# EAGLE board development (EAGLE 6.3)
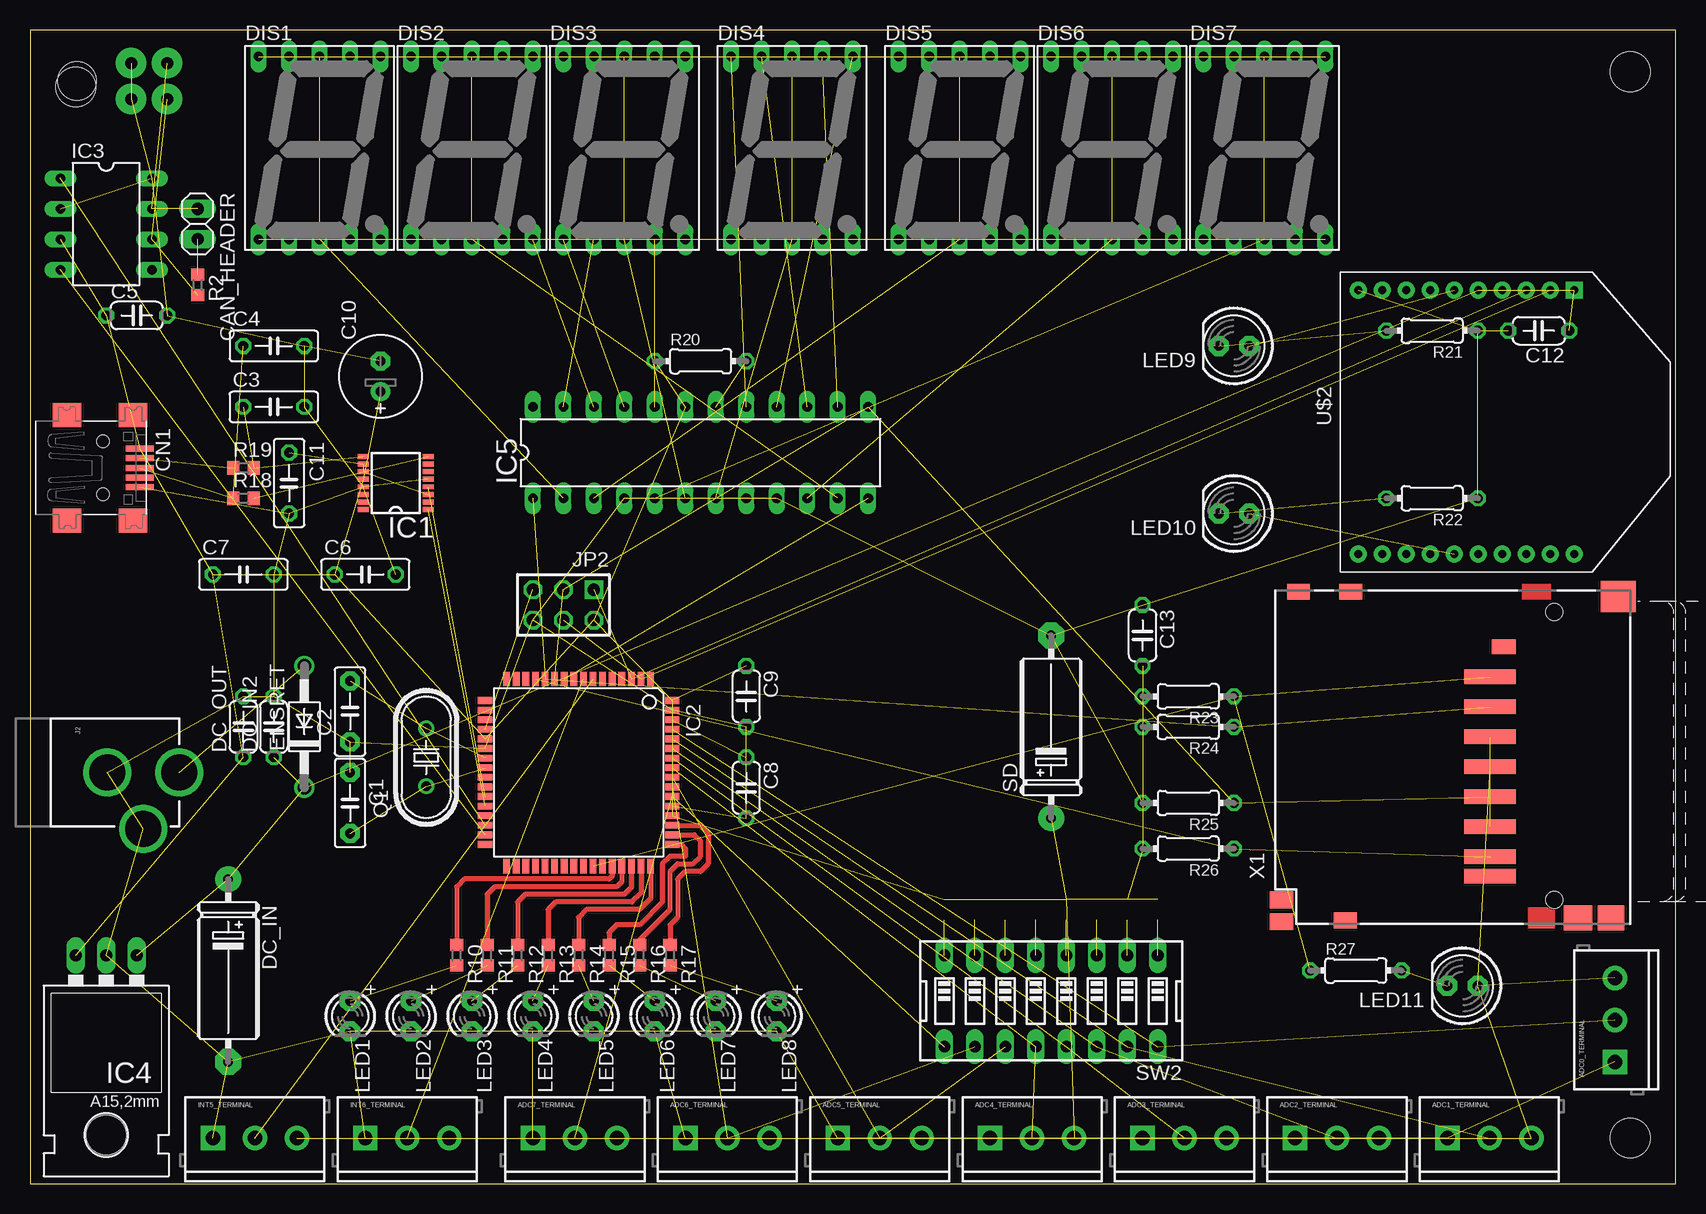
[diagram p0: board, top side]
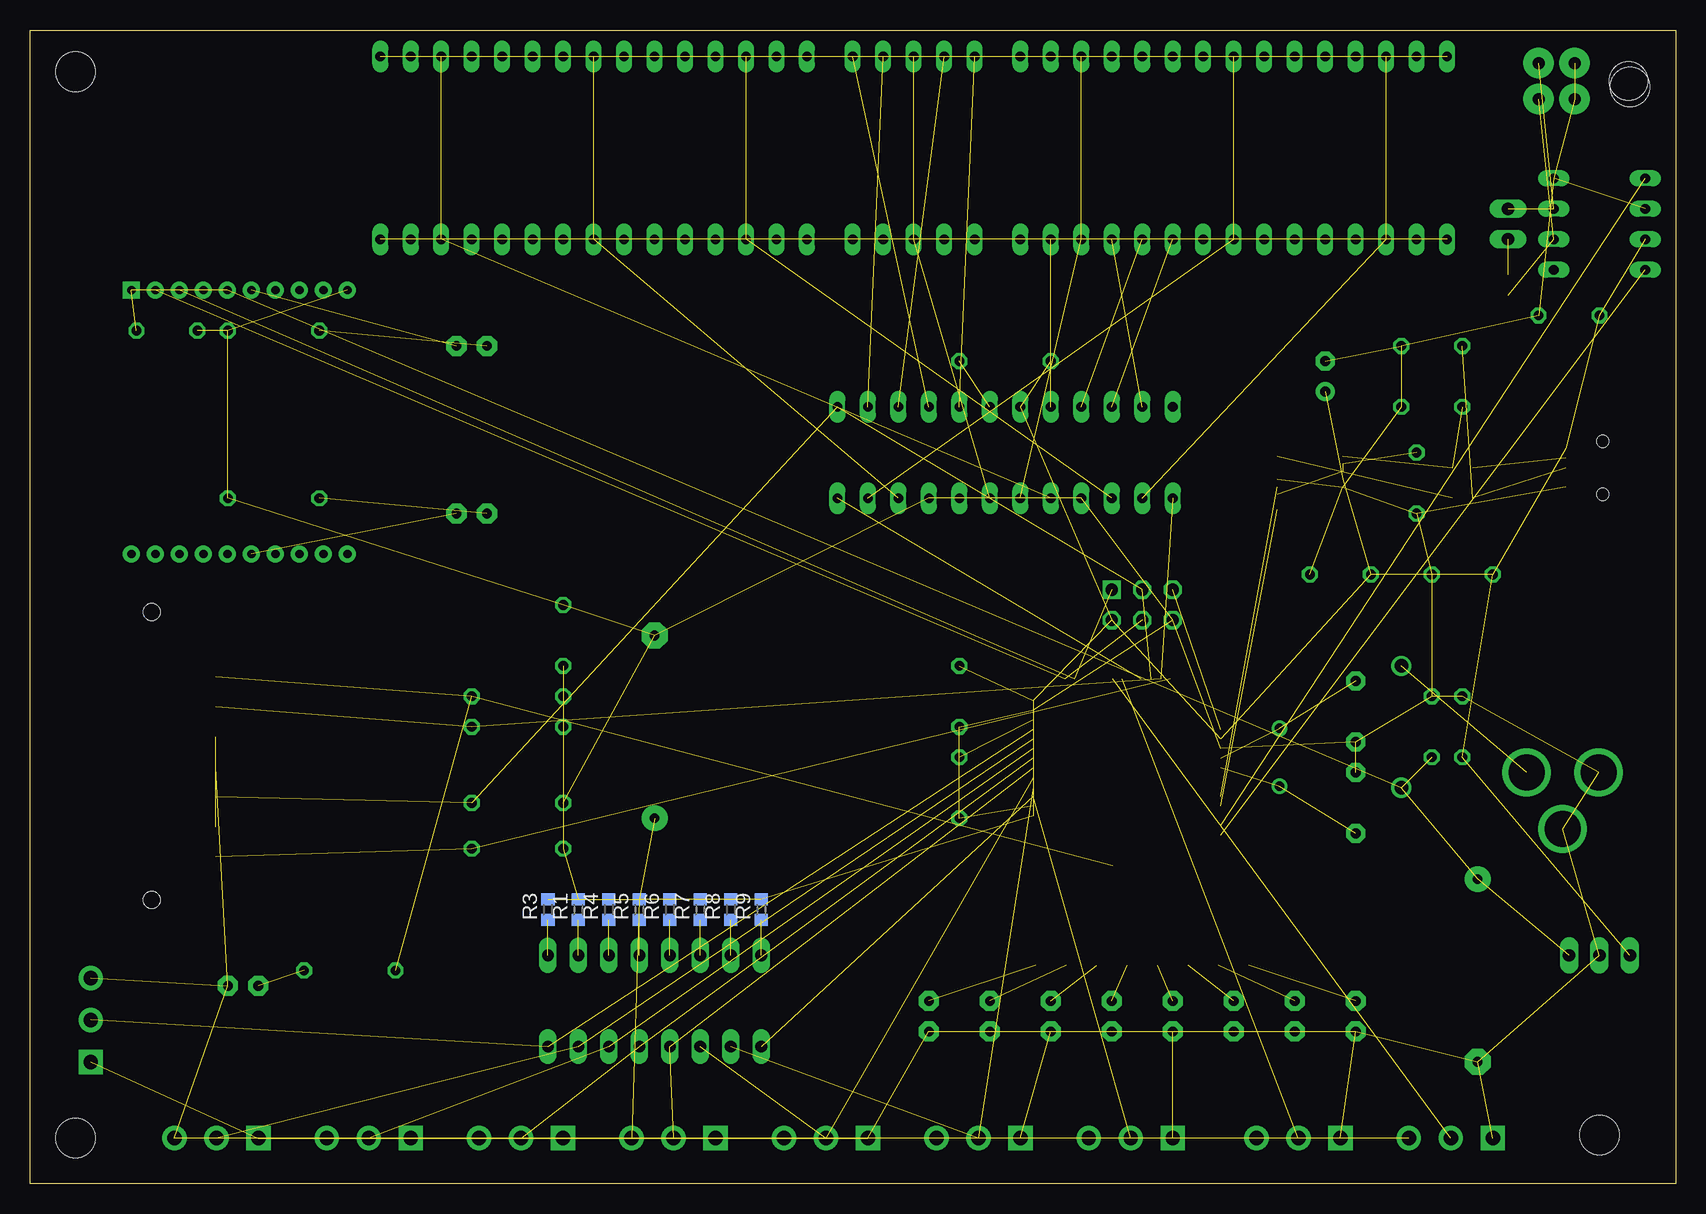
[diagram p1: board, bottom side, seen from below]

Size 137.14 x 96.19 mm. Coordinates in mm from the lower left corner, seen from the top.
Outline: 0,0 137.14,0 137.14,96.19 0,96.19 0,0
Copper layers (1*16): Top 0.035mm / dielectric 1.5mm / Bottom 0.035mm
Design rules "default *": minimum track width 16mil, minimum drill 24mil, track to track 8mil, track to pad 8mil, pad to pad 8mil, via to via 8mil, smd to smd 8mil, copper to edge 40mil, drill to drill 8mil, minimum pad ring 10mil, minimum via ring 8mil, stop-mask expansion 4mil, vias tented up to drill 0mil, thermal gap 10mil

## Footprints (pad centres in the part's own frame; a part is rotated, then mirrored left to right if it is on the bottom)
SCREWTERMINAL-3.5MM-3 = drill 1.2 pad 2.032 square: 1 0,0 | drill 1.2 pad 2.032: 2 3.5,0; 3 7,0
C5B2.5 = drill 0.813 pad 1.6 octagon: 1 -2.54,0; 2 2.54,0
C050-025X075 = drill 0.813 octagon: 1 -2.54,0; 2 2.54,0
C050-024X044 = drill 0.813 octagon: 1 -2.54,0; 2 2.54,0
E2,5-7 = drill 0.813 pad 1.6: + -1.27,0 | drill 0.813 pad 1.6 octagon: - 1.27,0
1X02 = drill 1.016 long: 1 -1.27,0; 2 1.27,0
USB-MINIB = smd 0.5 x 2.308: D+ 0,4.064; D- -0.8,4.064; GND 1.6,4.064; ID 0.8,4.064; VBUS -1.6,4.064 | smd 2 x 2.4: GND1 -4.4,-2; GND2 -4.4,3.5; GND3 4.4,3.5; GND4 4.4,-2 | hole 1: -2.2,1; 2.2,1
E15-5 = drill 0.813 pad 2.159: + -7.62,0 | drill 0.813 pad 2.159 octagon: - 7.62,0
HDSP-M = drill 0.813 long: 1 -5.08,-7.62; 2 -2.54,-7.62; 3 0,-7.62; 4 2.54,-7.62; 5 5.08,-7.62; 6 5.08,7.62; 7 2.54,7.62; 8 0,7.62; 9 -2.54,7.62; 10 -5.08,7.62
DO41-10 = drill 1.118: A 5.08,0; C -5.08,0
SSOP16 = smd 0.914 x 0.406: 1 -2.718,2.223; 2 -2.718,1.587; 3 -2.718,0.953; 4 -2.718,0.318; 5 -2.718,-0.318; 6 -2.718,-0.953; 7 -2.718,-1.587; 8 -2.718,-2.223; 9 2.718,-2.223; 10 2.718,-1.587; 11 2.718,-0.953; 12 2.718,-0.318; 13 2.718,0.318; 14 2.718,0.953; 15 2.718,1.587; 16 2.718,2.223
TQFP64 = smd 1.194 x 0.559: 1 -7.8,6; 2 -7.8,5.2; 3 -7.8,4.4; 4 -7.8,3.6; 5 -7.8,2.8; 6 -7.8,2; 7 -7.8,1.2; 8 -7.8,0.4; 9 -7.8,-0.4; 10 -7.8,-1.2; 11 -7.8,-2; 12 -7.8,-2.8; 13 -7.8,-3.6; 14 -7.8,-4.4; 15 -7.8,-5.2; 16 -7.8,-6; 33 7.8,-6; 34 7.8,-5.2; 35 7.8,-4.4; 36 7.8,-3.6; 37 7.8,-2.8; 38 7.8,-2; 39 7.8,-1.2; 40 7.8,-0.4; 41 7.8,0.4; 42 7.8,1.2; 43 7.8,2; 44 7.8,2.8; 45 7.8,3.6; 46 7.8,4.4; 47 7.8,5.2; 48 7.8,6 | smd 0.559 x 1.194: 17 -6,-7.8; 18 -5.2,-7.8; 19 -4.4,-7.8; 20 -3.6,-7.8; 21 -2.8,-7.8; 22 -2,-7.8; 23 -1.2,-7.8; 24 -0.4,-7.8; 25 0.4,-7.8; 26 1.2,-7.8; 27 2,-7.8; 28 2.8,-7.8; 29 3.6,-7.8; 30 4.4,-7.8; 31 5.2,-7.8; 32 6,-7.8; 49 6,7.8; 50 5.2,7.8; 51 4.4,7.8; 52 3.6,7.8; 53 2.8,7.8; 54 2,7.8; 55 1.2,7.8; 56 0.4,7.8; 57 -0.4,7.8; 58 -1.2,7.8; 59 -2,7.8; 60 -2.8,7.8; 61 -3.6,7.8; 62 -4.4,7.8; 63 -5.2,7.8; 64 -6,7.8
DIL08 = drill 0.813 long: 1 -3.81,-3.81; 2 -1.27,-3.81; 3 1.27,-3.81; 4 3.81,-3.81; 5 3.81,3.81; 6 1.27,3.81; 7 -1.27,3.81; 8 -3.81,3.81
78XXL = drill 1.016 long: GND 0,-3.81; IN -2.54,-3.81; OUT 2.54,-3.81 | hole 3.302: 0,11.176
DIL24-3 = drill 0.813 long: 1 -13.97,-3.81; 2 -11.43,-3.81; 3 -8.89,-3.81; 4 -6.35,-3.81; 5 -3.81,-3.81; 6 -1.27,-3.81; 7 1.27,-3.81; 8 3.81,-3.81; 9 6.35,-3.81; 10 8.89,-3.81; 11 11.43,-3.81; 12 13.97,-3.81; 13 13.97,3.81; 14 11.43,3.81; 15 8.89,3.81; 16 6.35,3.81; 17 3.81,3.81; 18 1.27,3.81; 19 -1.27,3.81; 20 -3.81,3.81; 21 -6.35,3.81; 22 -8.89,3.81; 23 -11.43,3.81; 24 -13.97,3.81
POWER_JACK_PTH = drill 2.997: GND 0,7.7; GNDBREAK 4.7,10.7; PWR 0,13.7
AVR-ISP-6 = drill 1.016 square: 1 -2.54,-1.27 | drill 1.016 octagon: 2 -2.54,1.27; 3 0,-1.27; 4 0,1.27; 5 2.54,-1.27; 6 2.54,1.27
STAND-OFF = hole 3.302: 0,0
LED3MM = drill 0.813 pad 1.676 octagon: A -1.27,0; K 1.27,0
LED5MM = drill 0.813 pad 1.676 octagon: A -1.27,0; K 1.27,0
HC49U70 = drill 0.813: 1 -2.413,0; 2 2.413,0
R0603 = smd 1 x 1.1: 1 -0.85,0; 2 0.85,0
0204/7 = drill 0.813 octagon: 1 -3.81,0; 2 3.81,0
DIPSWITCH-08 = drill 0.97 long: 1 -8.89,-3.81; 2 -6.35,-3.81; 3 -3.81,-3.81; 4 -1.27,-3.81; 5 1.27,-3.81; 6 3.81,-3.81; 7 6.35,-3.81; 8 8.89,-3.81; 9 8.89,3.81; 10 6.35,3.81; 11 3.81,3.81; 12 1.27,3.81; 13 -1.27,3.81; 14 -3.81,3.81; 15 -6.35,3.81; 16 -8.89,3.81
MICROFIT4SOCK = drill 1 pad 2.54: PIN1 -2,0; PIN2 1,0; PIN3 -2,-3; PIN4 1,-3 | hole 3.2: -0.5,-7.5
XBEE = drill 0.7 pad 1.422 square: 1 -11,5.5 | drill 0.7 pad 1.422: 2 -11,3.5; 3 -11,1.5; 4 -11,-0.5; 5 -11,-2.5; 6 -11,-4.5; 7 -11,-6.5; 8 -11,-8.5; 9 -11,-10.5; 10 -11,-12.5; 11 11,-12.5; 12 11,-10.5; 13 11,-8.5; 14 11,-6.5; 15 11,-4.5; 16 11,-2.5; 17 11,-0.5; 18 11,1.5; 19 11,3.5; 20 11,5.5
SDBMF-009XXBXX2 = smd 1.2 x 4.3: 1 6.7,5.325; 2 4.2,5.325; 3 1.7,5.325; 4 -0.8,5.325; 5 -3.3,5.325; 6 -5.8,5.325; 7 -8.3,5.325; 8 -9.925,5.325 | smd 1.2 x 2: 9 9.2,4.175 | smd 2.1 x 2.4: M1 -13.4,-2 | smd 2.6 x 2.9: M2 13.4,-5.35 | smd 1.3 x 1.9: M3 -13.6,17.4; M4 13.8,16.95; M5 13.8,21.3 | smd 1.4 x 1.95: SW1 -11.9,22.7; SW3 -13.7,22.7 | smd 2.1 x 2.2: SW2 -13.4,-4.75 | hole 1.4: -11.9,0; 12.1,0

## Placement (x,y rotation side)
ADC0_TERMINAL  [SCREWTERMINAL-3.5MM-3]  132.08,10.16 90 top
ADC1_TERMINAL  [SCREWTERMINAL-3.5MM-3]  118.11,3.81 0 top
ADC2_TERMINAL  [SCREWTERMINAL-3.5MM-3]  105.41,3.81 0 top
ADC3_TERMINAL  [SCREWTERMINAL-3.5MM-3]  92.71,3.81 0 top
ADC4_TERMINAL  [SCREWTERMINAL-3.5MM-3]  80.01,3.81 0 top
ADC5_TERMINAL  [SCREWTERMINAL-3.5MM-3]  67.31,3.81 0 top
ADC6_TERMINAL  [SCREWTERMINAL-3.5MM-3]  54.61,3.81 0 top
ADC7_TERMINAL  [SCREWTERMINAL-3.5MM-3]  41.91,3.81 0 top
C1  22pF  [C5B2.5]  26.67,31.75 270 top
C2  22pF  [C5B2.5]  26.67,39.37 90 top
C3  47pf  [C050-025X075]  20.32,64.77 0 top
C4  47pf  [C050-025X075]  20.32,69.85 0 top
C5  100nF  [C050-024X044]  8.89,72.39 0 top
C6  10nf  [C050-025X075]  27.94,50.8 0 top
C7  100nf  [C050-025X075]  17.78,50.8 0 top
C8  100nF  [C050-024X044]  59.69,33.02 270 top
C9  100nF  [C050-024X044]  59.69,40.64 270 top
C10  4.7uf  [E2,5-7]  29.21,67.31 90 top
C11  100nf  [C050-025X075]  21.59,58.42 270 top
C12  100nF  [C050-024X044]  125.73,71.12 180 top
C13  100nF  [C050-024X044]  92.71,45.72 270 top
CAN_HEADER  [1X02]  13.97,80.01 270 top
CN1  [USB-MINIB]  5.08,59.69 270 top
DC_IN  330uF  [E15-5]  16.51,17.78 270 top
DC_IN2  100nF  [C050-024X044]  20.32,38.1 90 top
DC_OUT  100nF  [C050-024X044]  17.78,38.1 90 top
DIS1  HD-H101  [HDSP-M]  24.13,86.36 0 top
DIS2  HD-H101  [HDSP-M]  36.83,86.36 0 top
DIS3  HD-H101  [HDSP-M]  49.53,86.36 0 top
DIS4  HD-H101  [HDSP-M]  63.5,86.36 0 top
DIS5  HD-H101  [HDSP-M]  77.47,86.36 0 top
DIS6  HD-H101  [HDSP-M]  90.17,86.36 0 top
DIS7  HD-H101  [HDSP-M]  102.87,86.36 0 top
ENSRET  1N4004  [DO41-10]  22.86,38.1 90 top
IC1  FT230XS  [SSOP16]  30.48,58.42 180 top
IC2  MEGA128-A  [TQFP64]  45.72,34.29 270 top
IC3  PCA82C250  [DIL08]  6.35,80.01 270 top
IC4  [78XXL]  6.35,15.24 180 top
IC5  MAX7219CNG  [DIL24-3]  55.88,60.96 0 top
INT5_TERMINAL  [SCREWTERMINAL-3.5MM-3]  15.24,3.81 0 top
INT6_TERMINAL  [SCREWTERMINAL-3.5MM-3]  27.94,3.81 0 top
J2  POWER_JACKPTH  [POWER_JACK_PTH]  -1.27,34.29 270 top
JP2  AVR-ISP-6  [AVR-ISP-6]  44.45,48.26 180 top
JP3  STAND-OFF  [STAND-OFF]  133.35,3.81 0 top
JP4  STAND-OFF  [STAND-OFF]  133.35,92.71 0 top
JP6  STAND-OFF  [STAND-OFF]  3.81,91.44 0 top
LED1  [LED3MM]  26.67,13.97 270 top
LED2  [LED3MM]  31.75,13.97 270 top
LED3  [LED3MM]  36.83,13.97 270 top
LED4  [LED3MM]  41.91,13.97 270 top
LED5  [LED3MM]  46.99,13.97 270 top
LED6  [LED3MM]  52.07,13.97 270 top
LED7  [LED3MM]  57.15,13.97 270 top
LED8  [LED3MM]  62.23,13.97 270 top
LED9  [LED5MM]  100.33,69.85 180 top
LED10  [LED5MM]  100.33,55.88 180 top
LED11  [LED5MM]  119.38,16.51 180 top
Q1  12 MHz  [HC49U70]  33.02,35.56 90 top
R1  [R0603]  91.44,22.86 90 bottom
R2  120  [R0603]  13.97,74.93 270 top
R3  [R0603]  93.98,22.86 90 bottom
R4  [R0603]  88.9,22.86 90 bottom
R5  [R0603]  86.36,22.86 90 bottom
R6  [R0603]  83.82,22.86 90 bottom
R7  [R0603]  81.28,22.86 90 bottom
R8  [R0603]  78.74,22.86 90 bottom
R9  [R0603]  76.2,22.86 90 bottom
R10  200  [R0603]  35.56,19.05 270 top
R11  200  [R0603]  38.1,19.05 270 top
R12  200  [R0603]  40.64,19.05 270 top
R13  200  [R0603]  43.18,19.05 270 top
R14  200  [R0603]  45.72,19.05 270 top
R15  200  [R0603]  48.26,19.05 270 top
R16  200  [R0603]  50.8,19.05 270 top
R17  200  [R0603]  53.34,19.05 270 top
R18  27  [R0603]  17.78,57.15 0 top
R19  27  [R0603]  17.78,59.69 0 top
R20  9.5k  [0204/7]  55.88,68.58 0 top
R21  9.5k  [0204/7]  116.84,71.12 180 top
R22  9.5k  [0204/7]  116.84,57.15 180 top
R23  47k  [0204/7]  96.52,40.64 180 top
R24  47k  [0204/7]  96.52,38.1 180 top
R25  47k  [0204/7]  96.52,31.75 180 top
R26  47k  [0204/7]  96.52,27.94 180 top
R27  500  [0204/7]  110.49,17.78 0 top
SD  4.7uf  [E15-5]  85.09,38.1 90 top
SW2  [DIPSWITCH-08]  85.09,15.24 180 top
U$1  MICROFIT4  [MICROFIT4SOCK]  11.43,91.44 270 top
U$2  XBEE  [XBEE]  123.19,63.5 270 top
X1  SDBMF  [SDBMF-009XXBXX2]  127,35.56 90 top

## Library data of the parts
ADC0_TERMINAL ADC1_TERMINAL ADC2_TERMINAL ADC3_TERMINAL ADC4_TERMINAL ADC5_TERMINAL ADC6_TERMINAL ADC7_TERMINAL IC4 INT5_TERMINAL INT6_TERMINAL J2 JP3 JP4 JP6 SW2 = SparkFun
C1 C2 = capacitor-wima
C3-C13 DC_IN DC_IN2 DC_OUT SD = rcl
CAN_HEADER = pinhead
CN1 LED1-LED11 U$2 = adafruit
DIS1-DIS7 = display-hp; OC_FARNELL: unknown; OC_NEWARK: unknown
ENSRET = diode
IC1 = ftdichip
IC2 = atmel
IC3 = micro-philips
IC5 = maxim; MF: MAXIM; MPN: MAX7219CNG; OC_FARNELL: 1523914; OC_NEWARK: 34C4018
JP2 = avr-5
Q1 = crystal
R1-R27 = resistor
U$1 = UNICORN
X1 = farnell

## Nets
+5V: ADC0_TERMINAL.3 ADC1_TERMINAL.3 ADC2_TERMINAL.3 ADC3_TERMINAL.3 ADC4_TERMINAL.3 ADC5_TERMINAL.3 ADC6_TERMINAL.3 ADC7_TERMINAL.3 C5.1 C6.1 C7.1 C9.1 C10.+ C13.2 CN1.VBUS DC_OUT.1 IC1.12 IC2.21 IC2.52 IC2.64 IC3.3 IC4.OUT IC5.19 INT5_TERMINAL.3 INT6_TERMINAL.3 JP2.2 LED11.A R1.2 R3.2 R4.2 R5.2 R6.2 R7.2 R8.2 R9.2 R20.1 R23.2 R24.2 R26.2 SD.+ X1.4
ADC0: ADC0_TERMINAL.2 IC2.61 SW2.16
ADC1: ADC1_TERMINAL.2 IC2.60 SW2.15
ADC2: ADC2_TERMINAL.2 IC2.59 SW2.14
ADC3: ADC3_TERMINAL.2 IC2.58 SW2.13
ADC4: ADC4_TERMINAL.2 IC2.57 SW2.12
ADC5: ADC5_TERMINAL.2 IC2.56 SW2.11
ADC6: ADC6_TERMINAL.2 IC2.55 SW2.10
ADC7: ADC7_TERMINAL.2 IC2.54 SW2.9
CANJUMP1: CAN_HEADER.1 IC3.7 U$1.PIN1
CANJUMP2: CAN_HEADER.2 R2.1
INT5: IC2.7 INT5_TERMINAL.2
INT6: IC2.8 INT6_TERMINAL.2
INT7: IC2.9
MISO/TXD0: IC2.3 JP2.1 U$2.3
MOSI/RXD0: IC2.2 JP2.4 U$2.2
N$1: C1.2 IC2.24 Q1.1
N$2: C2.2 IC2.23 Q1.2
N$3: R1.1 SW2.2
N$4: R3.1 SW2.1
N$5: ENSRET.A J2.PWR
N$6: IC2.44 R10.1
N$7: R4.1 SW2.3
N$8: LED1.A R10.2
N$9: IC2.45 R11.1
N$10: C8.1 IC2.62
N$11: LED2.A R11.2
N$12: IC2.46 R12.1
N$13: LED3.A R12.2
N$14: R5.1 SW2.4
N$15: R6.1 SW2.5
N$16: R7.1 SW2.6
N$17: R8.1 SW2.7
N$18: IC2.47 R13.1
N$19: LED4.A R13.2
N$20: R9.1 SW2.8
N$21: IC2.48 R14.1
N$22: LED5.A R14.2
N$23: IC2.49 R15.1
N$24: IC2.50 R16.1
N$25: LED6.A R15.2
N$26: LED7.A R16.2
N$27: IC2.51 R17.1
N$28: LED8.A R17.2
N$29: C3.1 IC1.9 R19.2
N$30: IC1.8 R18.2
N$31: C4.1 CN1.D+ R18.1
N$32: CN1.D- R19.1
N$33: DIS1.7 DIS2.7 DIS3.7 DIS4.7 DIS5.7 DIS6.7 DIS7.7 IC5.14
N$34: DIS1.6 DIS2.6 DIS3.6 DIS4.6 DIS5.6 DIS6.6 DIS7.6 IC5.16
N$35: DIS1.4 DIS2.4 DIS3.4 DIS4.4 DIS5.4 DIS6.4 DIS7.4 IC5.20
N$36: C11.1 IC1.3 IC1.10 IC1.11
N$37: DIS1.2 DIS2.2 DIS3.2 DIS4.2 DIS5.2 DIS6.2 DIS7.2 IC5.23
N$38: DIS1.1 DIS2.1 DIS3.1 DIS4.1 DIS5.1 DIS6.1 DIS7.1 IC5.21
N$39: DIS1.9 DIS2.9 DIS3.9 DIS4.9 DIS5.9 DIS6.9 DIS7.9 IC5.15
N$40: DIS1.10 DIS2.10 DIS3.10 DIS4.10 DIS5.10 DIS6.10 DIS7.10 IC5.17
N$41: DIS1.5 DIS2.5 DIS3.5 DIS4.5 DIS5.5 DIS6.5 DIS7.5 IC5.22
N$42: DIS1.3 DIS1.8 IC5.2
N$43: DIS2.3 DIS2.8 IC5.11
N$44: DIS3.3 DIS3.8 IC5.6
N$45: DIS4.3 DIS4.8 IC5.7
N$46: DIS5.3 DIS5.8 IC5.3
N$47: DIS6.3 DIS6.8 IC5.10
N$48: DIS7.3 DIS7.8 IC5.5
N$49: LED9.K R21.2
N$50: IC5.18 R20.2
N$51: IC3.6 R2.2 U$1.PIN2
N$52: LED9.A U$2.6
N$53: IC2.10 IC5.12
N$55: LED10.A U$2.15
N$56: LED10.K R22.2
N$57: X1.3 X1.6
N$59: IC2.42 R23.1 R27.1 X1.1
N$60: IC2.12 IC5.1 R24.1 X1.2
N$62: IC2.13 R26.1 X1.7
N$63: LED11.K R27.2
PE: ADC0_TERMINAL.1 ADC1_TERMINAL.1 ADC2_TERMINAL.1 ADC3_TERMINAL.1 ADC4_TERMINAL.1 ADC5_TERMINAL.1 ADC6_TERMINAL.1 ADC7_TERMINAL.1 C1.1 C2.1 C3.2 C4.2 C5.2 C6.2 C7.2 C8.2 C9.2 C10.- C11.2 C12.2 C13.1 CN1.GND DC_IN2.2 DC_IN.- DC_OUT.2 IC1.5 IC1.13 IC2.22 IC2.53 IC2.63 IC3.2 IC3.8 IC4.GND IC5.4 IC5.9 INT5_TERMINAL.1 INT6_TERMINAL.1 J2.GND J2.GNDBREAK JP2.6 LED1.K LED2.K LED3.K LED4.K LED5.K LED6.K LED7.K LED8.K R21.1 R22.1 R25.2 SD.- U$1.PIN3 U$1.PIN4 U$2.10
RESET: IC2.20 JP2.5
RXCAN: IC2.31 IC3.4
RXD1: IC1.4 IC2.27
SCK: IC2.11 IC5.13 JP2.3 R25.1 X1.5
SCL: IC2.25
SDA: IC2.26
TXCAN: IC2.30 IC3.1
TXD1: IC1.1 IC2.28
VCC: C12.1 DC_IN2.1 DC_IN.+ ENSRET.C IC4.IN U$2.1 U$2.5

## Tracks (layer width: path | path; a pad name or v marks a point on that pad's centre or on a via)
+5V  (40 unrouted)
ADC0  (2 unrouted)
ADC1  (2 unrouted)
ADC2  (2 unrouted)
ADC3  (2 unrouted)
ADC4  (2 unrouted)
ADC5  (2 unrouted)
ADC6  (2 unrouted)
ADC7  (2 unrouted)
CANJUMP1  (2 unrouted)
CANJUMP2  (1 unrouted)
INT5  (1 unrouted)
INT6  (1 unrouted)
MISO/TXD0  (2 unrouted)
MOSI/RXD0  (2 unrouted)
N$1  (2 unrouted)
N$2  (2 unrouted)
N$3  (1 unrouted)
N$4  (1 unrouted)
N$5  (1 unrouted)
N$6
  Top 0.406: IC2.44 48.52,25.66 48.26,25.4 36.2,25.4 35.56,24.77 R10.1
N$7  (1 unrouted)
N$8  (1 unrouted)
N$9
  Top 0.406: IC2.45 49.32,25.19 48.89,24.77 38.73,24.77 38.1,24.13 R11.1
N$10  (1 unrouted)
N$11  (1 unrouted)
N$12
  Top 0.406: IC2.46 50.12,24.72 49.53,24.13 41.27,24.13 40.64,23.5 R12.1
N$13  (1 unrouted)
N$14  (1 unrouted)
N$15  (1 unrouted)
N$16  (1 unrouted)
N$17  (1 unrouted)
N$18
  Top 0.406: IC2.47 50.92,24.25 50.16,23.5 43.81,23.5 43.18,22.86 R13.1
N$19  (1 unrouted)
N$20  (1 unrouted)
N$21
  Top 0.406: IC2.48 51.72,23.78 50.8,22.86 46.35,22.86 45.72,22.23 R14.1
N$22  (1 unrouted)
N$23
  Top 0.406: IC2.49 54.26,28.29 54.61,27.94 54.61,27.3 53.34,27.3 52.7,26.67 52.7,23.5 50.8,21.59 48.89,21.59 48.26,20.96 R15.1
N$24
  Top 0.406: R16.1 50.8,20.32 53.34,22.86 53.34,26.04 53.98,26.67 55.24,26.67 55.88,27.3 55.88,28.57 55.37,29.09 IC2.50
N$25  (1 unrouted)
N$26  (1 unrouted)
N$27
  Top 0.406: IC2.51 55.84,29.89 56.52,29.21 56.52,26.67 55.88,26.04 54.61,26.04 53.98,25.4 53.98,22.23 53.34,21.59 R17.1
N$28  (1 unrouted)
N$29  (2 unrouted)
N$30  (1 unrouted)
N$31  (2 unrouted)
N$32  (1 unrouted)
N$33  (7 unrouted)
N$34  (7 unrouted)
N$35  (7 unrouted)
N$36  (3 unrouted)
N$37  (7 unrouted)
N$38  (7 unrouted)
N$39  (7 unrouted)
N$40  (7 unrouted)
N$41  (7 unrouted)
N$42  (2 unrouted)
N$43  (2 unrouted)
N$44  (2 unrouted)
N$45  (2 unrouted)
N$46  (2 unrouted)
N$47  (2 unrouted)
N$48  (2 unrouted)
N$49  (1 unrouted)
N$50  (1 unrouted)
N$51  (2 unrouted)
N$52  (1 unrouted)
N$53  (1 unrouted)
N$55  (1 unrouted)
N$56  (1 unrouted)
N$57  (1 unrouted)
N$59  (3 unrouted)
N$60  (3 unrouted)
N$62  (2 unrouted)
N$63  (1 unrouted)
PE  (54 unrouted)
RESET  (1 unrouted)
RXCAN  (1 unrouted)
RXD1  (1 unrouted)
SCK  (4 unrouted)
TXCAN  (1 unrouted)
TXD1  (1 unrouted)
VCC  (6 unrouted)